# EAGLE board Satellite (EAGLE 5.11)

Size 116.82 x 78.41 mm. Coordinates in mm from the lower left corner, seen from the top.
Outline: 0,0 116.82,0 116.82,78.41 0,78.41 0,0
Copper layers (1*16): Top 0.035mm / dielectric 1.5mm / Bottom 0.035mm
Design rules "SparkFun": minimum track width 8mil, minimum drill 20mil, track to track 8mil, track to pad 8mil, pad to pad 8mil, via to via 8mil, smd to smd 8mil, copper to edge 10mil, drill to drill 8mil, minimum pad ring 12mil, minimum via ring 10mil, stop-mask expansion 4mil, vias tented up to drill 25mil, thermal gap 10mil
Net classes: 1 AC_HOT: width 0.813 mm, clearance 0.381 mm

## Footprints (pad centres in the part's own frame; a part is rotated, then mirrored left to right if it is on the bottom)
TACTILE-PTH = drill 1.016 pad 1.88 round: 1 -3.251,2.261; 2 3.251,2.261; 3 -3.251,-2.261; 4 3.251,-2.261
CAP-PTH-SMALL2 = drill 0.7 pad 1.651 round: 1 0,0; 2 2.54,0
E7,5-16 = drill 1.016 pad 3.15 round: + -3.81,0 | drill 1.016 pad 3.15 octagon: - 3.81,0
C5B5 = drill 0.813 pad 1.6 octagon: 1 -2.54,0; 2 2.54,0
PTC = drill 0.8 pad 1.88 round: P$1 -2.54,0; P$2 2.54,0
DIL28-3 = drill 0.813 long: 1 -16.51,-3.81; 2 -13.97,-3.81; 3 -11.43,-3.81; 4 -8.89,-3.81; 5 -6.35,-3.81; 6 -3.81,-3.81; 7 -1.27,-3.81; 8 1.27,-3.81; 9 3.81,-3.81; 10 6.35,-3.81; 11 8.89,-3.81; 12 11.43,-3.81; 13 13.97,-3.81; 14 16.51,-3.81; 15 16.51,3.81; 16 13.97,3.81; 17 11.43,3.81; 18 8.89,3.81; 19 6.35,3.81; 20 3.81,3.81; 21 1.27,3.81; 22 -1.27,3.81; 23 -3.81,3.81; 24 -6.35,3.81; 25 -8.89,3.81; 26 -11.43,3.81; 27 -13.97,3.81; 28 -16.51,3.81
2X3 = drill 1.016 pad 1.88 octagon: 1 0,0; 2 0,2.54; 3 2.54,0; 4 2.54,2.54; 5 5.08,0; 6 5.08,2.54
POWER_JACK_PTH = drill 2.997 pad 4.318 round: GND 0,7.7; GNDBREAK 4.7,10.7; PWR 0,13.7
1X06 = drill 1.016 pad 1.88 round: 1 0,0; 2 2.54,0; 3 5.08,0; 4 7.62,0; 5 10.16,0; 6 12.7,0
1X04 = drill 1.016 pad 1.88 square: 1 0,0 | drill 1.016 pad 1.88 round: 2 2.54,0; 3 5.08,0; 4 7.62,0
STAND-OFF = hole 3.302: 0,0
1X03 = drill 1.016 pad 1.88 round: 1 0,0; 2 2.54,0; 3 5.08,0
DIL06 = drill 0.813 offset: 1 -2.54,-3.81; 2 0,-3.81; 3 2.54,-3.81; 4 2.54,3.81; 5 0,3.81; 6 -2.54,3.81
LED3MM = drill 0.813 octagon: A -1.27,0; K 1.27,0
AXIAL-0.4 = drill 0.9 pad 1.88 round: P$1 -5.08,0; P$2 5.08,0
AXIAL-0.5 = drill 0.9 pad 1.88 round: P$1 -6.35,0; P$2 6.35,0
SWITCH-SPDT_KIT = drill 1.016 pad 1.88 round: 1 0,2.718; 2 0,0; 3 0,-2.718
TO220AB = drill 1.118 long: 1 -2.54,-6.35; 2 0,-6.35; 3 2.54,-6.35 | hole 3.302: 0,11.176
RN41 = smd 0.8 x 1.6: 1 -6.6,-6.6; 2 -5.4,-6.6; 3 -4.2,-6.6; 4 -3,-6.6; 5 -1.8,-6.6; 6 -0.6,-6.6; 7 0.6,-6.6; 8 1.8,-6.6; 9 3,-6.6; 10 4.2,-6.6; 11 5.4,-6.6; 12 6.6,-6.6; 13 6.6,6.6; 14 5.4,6.6; 15 4.2,6.6; 16 3,6.6; 17 1.8,6.6; 18 0.6,6.6; 19 -0.6,6.6; 20 -1.8,6.6; 21 -3,6.6; 22 -4.2,6.6; 23 -5.4,6.6; 24 -6.6,6.6 | smd 1.6 x 0.8: 25 -9.4,4.8; 26 -9.4,3.2; 27 -9.4,1.6; 28 9.4,3.1; 29 9.4,-3.1; 30 9.4,-4.122; 31 9.4,-1.9; 32 9.4,-0.7; 33 9.4,0.7; 34 9.4,1.9; 35 9.4,4.122
78XXL = drill 1.016 long: GND 0,-3.81; IN -2.54,-3.81; OUT 2.54,-3.81 | hole 3.302: 0,11.176
MKDS_5/3-500 = drill 1.3 pad 2.5 round: 1 -5.1,1.27; 2 0,1.27; 3 5.1,1.27
HC49US = drill 0.7 pad 1.651 round: 1 -2.54,0; 2 2.54,0

## Placement (x,y rotation side)
BT_RST  [TACTILE-PTH]  66.15,64.58 0 top
C1  18pF  [CAP-PTH-SMALL2]  12.7,38.1 0 top
C2  0.1uF  [CAP-PTH-SMALL2]  12.7,33.02 0 top
C3  18pF  [CAP-PTH-SMALL2]  12.7,43.18 0 top
C4  1000uF  [E7,5-16]  17.78,60.96 0 top
C5  0.1uF  [CAP-PTH-SMALL2]  54.9,45.39 0 top
C6  0.01uF  [C5B5]  78.74,45.21 180 top
F1  1A Fast Acting  [PTC]  38.1,5.08 0 top
IC1  MEGA8-P  [DIL28-3]  33.99,39.49 270 top
J1  AVR ISP  [2X3]  7.62,22.86 90 top
J2  POWER_JACKPTH  [POWER_JACK_PTH]  12.7,2.54 0 top
JP1  [1X06]  57.15,5.08 90 top
JP2  [1X06]  66.04,5.08 90 top
JP3  [1X06]  5.35,43.39 90 top
JP4  [1X04]  5.56,59.99 90 top
JP5  STAND-OFF  [STAND-OFF]  112.52,74.17 0 top
JP6  STAND-OFF  [STAND-OFF]  4.32,73.91 0 top
JP7  STAND-OFF  [STAND-OFF]  112.27,4.32 0 top
JP8  STAND-OFF  [STAND-OFF]  4.32,4.57 0 top
L2F_CONV  [1X03]  33.64,73.58 0 top
OK1  4N25M  [DIL06]  95.25,10.16 0 top
OK2  MOC3012M  [DIL06]  80.01,10.16 0 top
PIR_SENSOR  [1X03]  21.51,73.56 0 top
POWER  [LED3MM]  24.13,13.97 0 top
R1  10k  [AXIAL-0.4]  17.78,48.26 180 top
R2  47k 1/2W  [AXIAL-0.5]  80.01,59.69 180 top
R3  47k 1/2W  [AXIAL-0.5]  80.01,53.34 180 top
R4  10k  [AXIAL-0.4]  77.47,38.1 0 top
R5  47k 1/2W  [AXIAL-0.5]  80.01,72.39 180 top
R6  47k 1/2W  [AXIAL-0.5]  80.01,66.04 180 top
R7  1k  [AXIAL-0.4]  77.47,33.02 0 top
R8  180 1/2W  [AXIAL-0.5]  78.74,22.86 0 top
R10  330  [AXIAL-0.4]  35.56,12.7 180 top
R11  10k  [AXIAL-0.4]  67.31,50.8 90 top
R12  2.4k 1/2W  [AXIAL-0.5]  78.74,27.94 0 top
R14  10k  [AXIAL-0.4]  45.75,43.7 270 top
RESET  [TACTILE-PTH]  48.26,5.08 0 top
S1  [SWITCH-SPDT_KIT]  25.4,5.08 270 top
SERVO  [1X03]  11.15,73.61 0 top
T1  BT136  [TO220AB]  92.71,29.21 0 top
U$  BLUETOOTH-RN41"  [RN41]  52.79,61.6 270 top
VREG  3.3V  [78XXL]  60.96,27.94 0 top
X1  MKDS_5/3-5,00  [MKDS_5/3-500]  106.68,25.4 90 top
X2  MKDS_5/3-5,00  [MKDS_5/3-500]  106.68,54.61 90 top
Y1  16MHz  [HC49US]  22.86,35.92 90 top

## Library data of the parts
BT_RST C1-C3 C5 F1 J1 J2 JP1-JP8 L2F_CONV PIR_SENSOR R1-R8 R10-R12 R14 RESET S1 SERVO U$ VREG Y1 = SparkFun
C4 = rcl
C6 = capacitor-wima
IC1 = atmel
OK1 = optocoupler; MPN: 4N25-M; OC_FARNELL: 1021349; OC_NEWARK: 98K9084
OK2 = optocoupler; MF: FAIRCHILD SEMICONDUCTOR; MPN: MOC3012-M; OC_FARNELL: 1021364; OC_NEWARK: 72K8894
POWER = led
T1 = triac
X1 X2 = con-phoenix-mkds_5

## Nets
+3V3: C5.1 U$.11 VREG.OUT
+5V: C2.1 C4.+ F1.P$2 IC1.7 IC1.20 IC1.21 J1.2 JP1.1 JP4.1 JP4.3 L2F_CONV.2 PIR_SENSOR.1 R1.P$2 R10.P$2 R11.P$2 R14.P$2 SERVO.1 VREG.IN
AC1 [AC_HOT]: OK2.6 R8.P$1
AC2 [AC_HOT]: C6.1 R8.P$2 R12.P$1
AC_GND: X2.2
AC_HOT [AC_HOT]: R2.P$1 R3.P$1 R12.P$2 T1.2 X2.1
AC_IN [AC_HOT]: OK1.1 R2.P$2 R3.P$2
AC_NEUTRAL [AC_HOT]: C6.2 R5.P$1 R6.P$1 X1.3 X2.3
AC_OUT [AC_HOT]: T1.1 X1.1
GND: BT_RST.1 BT_RST.2 C1.2 C2.2 C3.2 C4.- C5.2 IC1.8 IC1.22 J1.6 J2.GND J2.GNDBREAK JP1.3 JP4.2 JP4.4 L2F_CONV.1 PIR_SENSOR.2 POWER.K RESET.1 RESET.2 SERVO.3 U$.1 U$.12 U$.25 U$.27 U$.28 U$.29 VREG.GND
GND2: JP2.3 OK1.4 OK2.2
LC: JP2.2 R7.P$2
LIGHT_CTRL: IC1.23 JP1.2 JP3.1
MISO: IC1.18 J1.1
MOSI: IC1.17 J1.4
N$1: IC1.24 JP3.2
N$2: J2.PWR S1.2
N$5: C3.1 IC1.10 Y1.1
N$6: C1.1 IC1.9 Y1.2
N$8: OK2.4 T1.3
N$10: JP2.5
N$13: JP2.6
N$15: IC1.26 JP3.4
N$18: F1.P$1 S1.1
N$19: POWER.A R10.P$1
N$21: IC1.27 JP3.5
N$22: IC1.28 JP3.6
N$29: OK2.1 R7.P$1
NEUT_IN [AC_HOT]: OK1.2 R5.P$2 R6.P$2
PCINT0: IC1.14 PIR_SENSOR.3 R14.P$1
PCINT20: IC1.6 L2F_CONV.3
PWR: JP2.1 R4.P$2
RESET: IC1.1 J1.5 R1.P$1 RESET.3 RESET.4
RST: BT_RST.3 BT_RST.4 R11.P$1 U$.5
RTC_CS: IC1.11
RTC_INT: IC1.5
RTS: U$.15 U$.16
RXD: IC1.2 U$.14
SCK: IC1.19 J1.3
SERVOCTRL: IC1.25 JP3.3 SERVO.2
TIMER1B: IC1.16 JP1.6
TXD: IC1.3 U$.13
ZC_INT: JP2.4 OK1.5 R4.P$1
ZERO_CROSS: IC1.4 JP1.4

## Tracks (layer width: path | path; a pad name or v marks a point on that pad's centre or on a via)
+3V3  (2 unrouted)
+5V  (17 unrouted)
AC1  (1 unrouted)
AC2  (2 unrouted)
AC_HOT  (4 unrouted)
AC_IN  (2 unrouted)
AC_NEUTRAL  (4 unrouted)
AC_OUT  (1 unrouted)
GND  (27 unrouted)
GND2  (2 unrouted)
LC  (1 unrouted)
LIGHT_CTRL  (2 unrouted)
MISO  (1 unrouted)
MOSI  (1 unrouted)
N$1  (1 unrouted)
N$2  (1 unrouted)
N$5  (2 unrouted)
N$6  (2 unrouted)
N$8  (1 unrouted)
N$15  (1 unrouted)
N$18  (1 unrouted)
N$19  (1 unrouted)
N$21  (1 unrouted)
N$22  (1 unrouted)
N$29  (1 unrouted)
NEUT_IN  (2 unrouted)
PCINT0  (2 unrouted)
PCINT20  (1 unrouted)
PWR  (1 unrouted)
RESET  (4 unrouted)
RST  (3 unrouted)
RTS  (1 unrouted)
RXD  (1 unrouted)
SCK  (1 unrouted)
SERVOCTRL  (2 unrouted)
TIMER1B  (1 unrouted)
TXD  (1 unrouted)
ZC_INT  (2 unrouted)
ZERO_CROSS  (1 unrouted)

## Text on the board
tPlace: SERVO | PIR | L2F Converter | VCC | DATA | GND | VCC | GND | DATA | GND | VCC | DATA | Satellite | Project LASAR | BT Reset | GND | C. Williams | 3-1-2012 | VCC | AC IN | GND | VCC | PC5 | PC4 | PC3 | PC2 | PC1 | PC0 | 0.1uF | 18pF | 0.1uF | 18pF | AC OUT | 0.1uF | TMR 1B | PWR LED | NC | Z_C | MOC3012M | H11AA1 | System Reset | GND | POWER | LtCtrl | VCC